# Altium PCB MainPcb.PcbDoc
Units mm, origin at the board's own origin, x right, y up, seen from the top; angles counter-clockwise.
Board outline 50 x 76 mm, 2 copper layers (Top Layer, Bottom Layer); 50 components, 76 nets, 385 pads, 50 vias.
Unrouted connection lines stored in the file: 139.
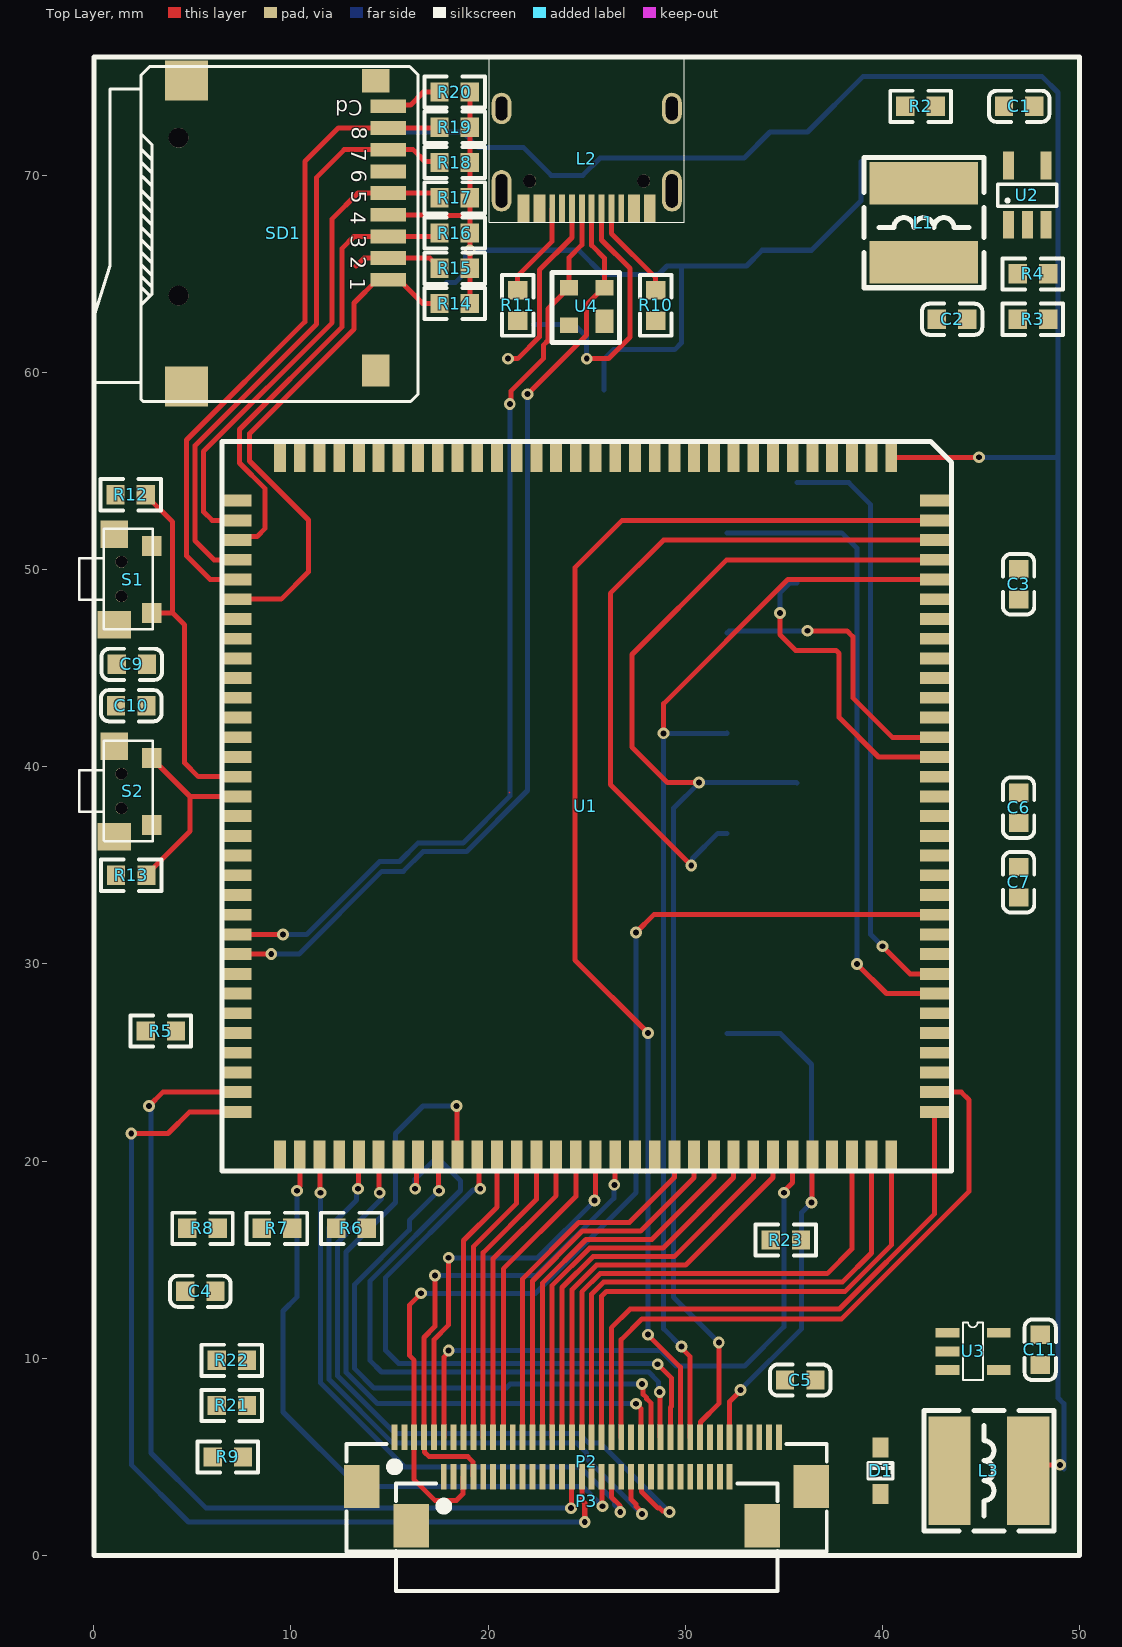
[diagram p0: Top Layer view]
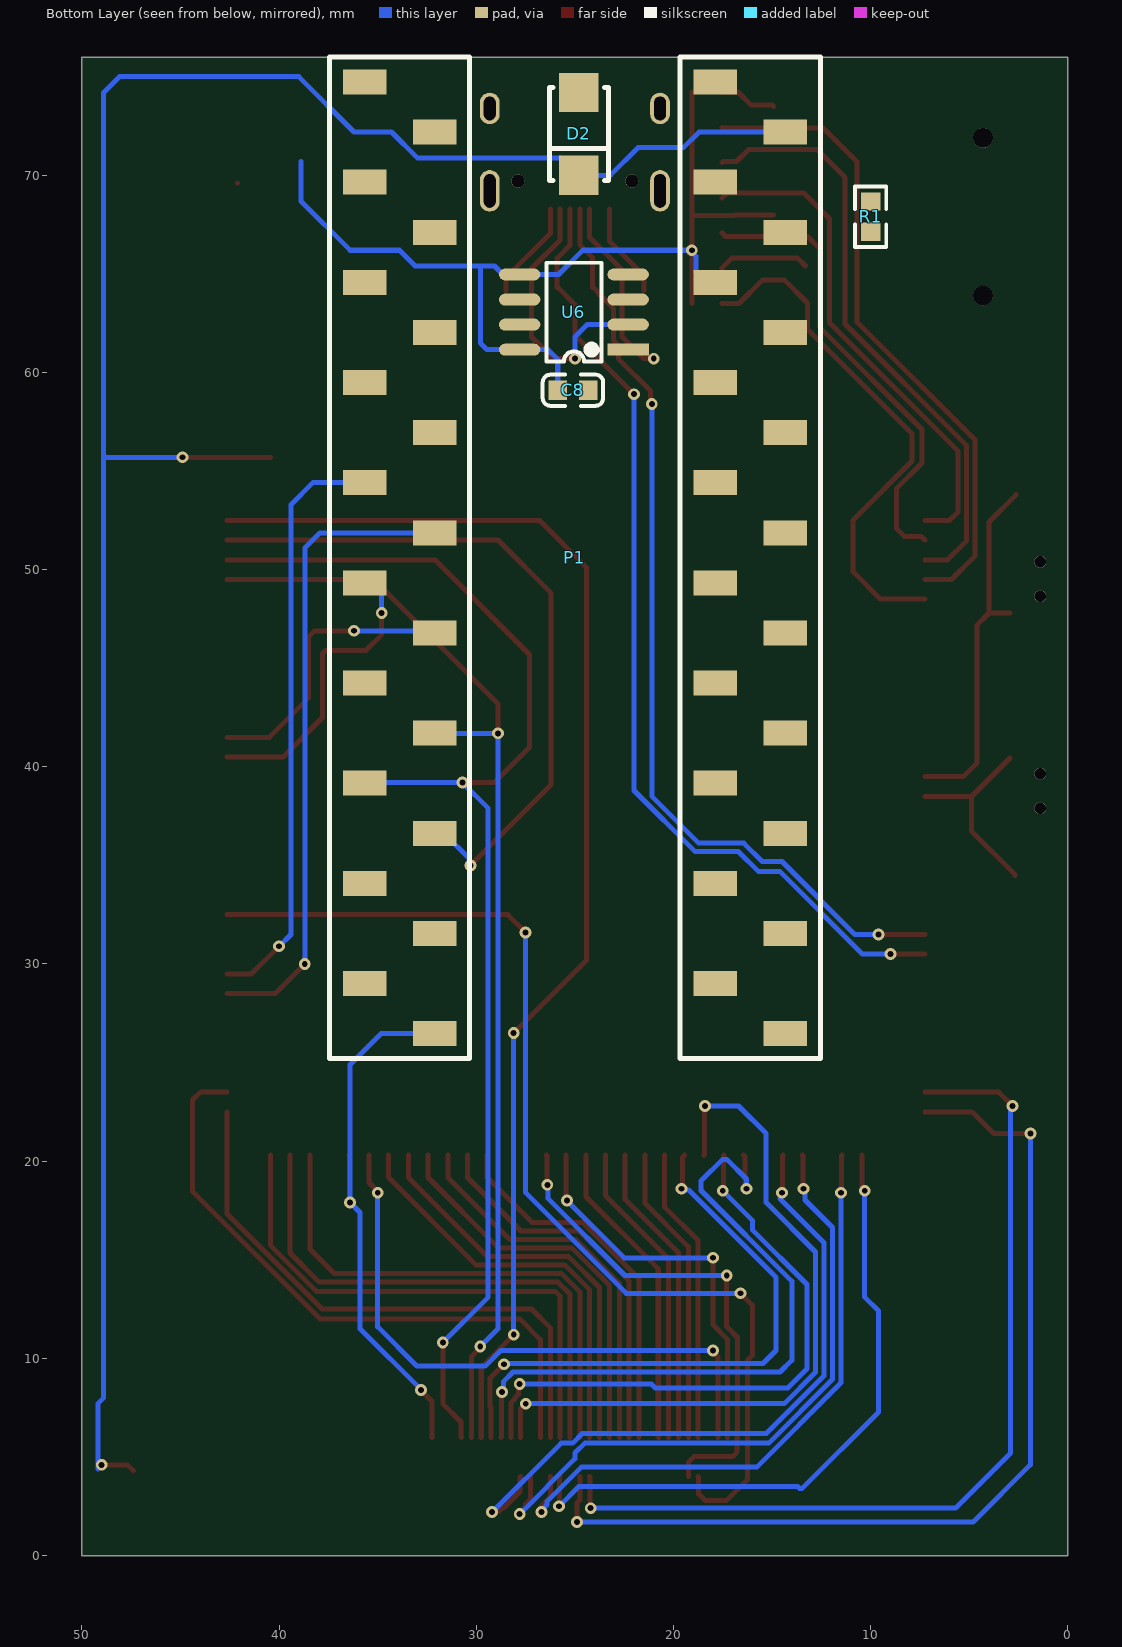
[diagram p1: Bottom Layer view, seen from below]

## Layer stack, top to bottom
Top Solder: solder mask 0.0102, Solder Resist, Dk 3.5
Top Layer: signal copper 0.0356
Dielectric 1: dielectric 0.32, FR-4, Dk 4.8
Bottom Layer: signal copper 0.0356
Bottom Solder: solder mask 0.0102, Solder Resist, Dk 3.5

## Board outline
0,0 0,76 50,76 50,0

## Design rules (kind name [scope] priority, off if disabled: settings)
Clearance [All] p1: gap=0.178 ignorepadtopadclearanceinfootprint=FALSE
PolygonConnect [All] p1: connectstyle=Relief reliefconductorwidth=0.254 reliefentries=4 polygonreliefangle="90 Angle" airgapwidth=0.254
RoutingVias [All] p1: holewidth=0.3 width=0.6 viastyle="Through Hole" minholewidth=0.3 minwidth=0.5 maxholewidth=0.3 maxwidth=1
SolderMaskExpansion [All] p1: expansion=0.102 istentingtop=FALSE
SupplyNets "Schematic Supply Nets_4" [InNet('VCCIO_3V3')] p1: voltage=0.000
SupplyNets "Schematic Supply Nets_2" [InNet('VSYS')] p2: voltage=0.000
SupplyNets "Schematic Supply Nets_1" [InNet('VCC_3V3')] p3: voltage=0.000
SupplyNets "Schematic Supply Nets" [InNet('GND')] p4: voltage=0.000
Width [All] p1: maxlimit=25.4 minlimit=0.127 preferedwidth=0.254
30 further rules are at their usual default settings.

## Components (designator, comment, footprint, x,y, rotation, side; value= is the part's Value field where it differs from the comment)
C1 "10uF (106) 10% 10V" LC-0603_C 46.93,73.5 r180 top
C2 "22pF (220) 5% 50V" LC-0603_C 43.53,62.7 r180 top
C3 "10uF (106) 10% 10V" LC-0603_C 46.907,49.258 r90 top
C4 "1uF (105) 10% 50V" LC-0603_C 5.4,13.4 r0 top
C5 "1uF (105) 10% 50V" LC-0603_C 35.83,8.9 r180 top
C6 "1uF (105) 10% 50V" LC-0603_C 46.907,37.924 r90 top
C7 "10uF (106) 10% 10V" LC-0603_C 46.907,34.146 r90 top
C8 "1uF (105) 10% 50V" LC-0603_C 25.1,59.1 r0 bottom
C9 "100nF (104) 10% 50V" LC-0603_C 1.93,45.2 r0 top
C10 "100nF (104) 10% 50V" LC-0603_C 1.9,43.1 r0 top
C11 "1uF (105) 10% 50V" LC-0603_C 48,10.43 r90 top
D1 "1N4148WS T4" LC-SOD-323 39.9,4.3 r270 top
D2 "SS54" LC-SMA(DO-214AC)_S1 24.8,72.1 r90 bottom
L1 "2.2uH" L-CD52 42.1,67.6 r90 top
L2 "Micro-USB3.1_TYPE-C" USB_TYPEC_SMD_16P 25,72.317 r0 top
L3 "2.2uH" L-CD52 45.4,4.3 r0 top
P1 "PicoCale" PICO 25,76 r180 bottom locked
P2 "RGB LCD" FPC0.5-40 24.476,3.5 r0 top locked
P3 "MIPI LCD" FPC0.5-30 17.75,4 r0 top locked
R1 "10KΩ (1002) ±1%" LC-0603_R 10,67.9 r270 bottom
R2 "10KΩ (1002) ±1%" LC-0603_R 41.93,73.5 r180 top
R3 "10KΩ (1002) ±1%" LC-0603_R 47.63,62.7 r180 top
R4 "10KΩ (1002) ±1%" LC-0603_R 47.63,65 r0 top
R5 "0Ω (0R0) ±1%" LC-0603_R 3.4,26.6 r0 top
R6 "100KΩ (1003) ±1%" LC-0603_R 13.069,16.593 r0 top
R7 "10Ω (10R0) ±1%" LC-0603_R 9.291,16.593 r0 top
R8 "10Ω (10R0) ±1%" LC-0603_R 5.513,16.593 r0 top
R9 "10KΩ (1002) ±1%" LC-0603_R 6.8,5 r0 top
R10 "5.1KΩ (5101) ±1%" LC-0603_R 28.5,63.4 r90 top
R11 "5.1KΩ (5101) ±1%" LC-0603_R 21.5,63.4 r90 top
R12 "10KΩ (1002) ±1%" LC-0603_R 1.87,53.8 r180 top
R13 "10KΩ (1002) ±1%" LC-0603_R 1.9,34.5 r180 top
R14 "10KΩ (1002) ±1%" LC-0603_R 18.3,63.496 r0 top
R15 "10KΩ (1002) ±1%" LC-0603_R 18.3,65.284 r0 top
R16 "10KΩ (1002) ±1%" LC-0603_R 18.3,67.072 r0 top
R17 "10KΩ (1002) ±1%" LC-0603_R 18.3,68.86 r0 top
R18 "10KΩ (1002) ±1%" LC-0603_R 18.3,70.648 r0 top
R19 "10KΩ (1002) ±1%" LC-0603_R 18.3,72.436 r0 top
R20 "10KΩ (1002) ±1%" LC-0603_R 18.3,74.224 r0 top
R21 "10KΩ (1002) ±1%" LC-0603_R 7,7.612 r0 top
R22 "10KΩ (1002) ±1%" LC-0603_R 7,9.9 r0 top
R23 "10KΩ (1002) ±1%" LC-0603_R 35.1,16 r180 top
S1 "SW-PB" TS-1030 2.937,47.808 r0 top
S2 "SW-PB" TS-1030 2.937,37.058 r0 top
SD1 "SD-CARD" SD-CARD-Micro 4.7,74.8 r270 top locked
U1 "RK3506" RK3506 40.447,55.7 r180 top locked
U2 "SY8088" SOT23-5#1 46.4,67.5 r0 top
U3 "MP3302" SOT23-5#2 43.3,11.3 r0 top
U4 "UET14A05L03" SOT-143 25.9,62.4 r90 top
U6 "CH340N" SOP8 22.3,61.16 r0 bottom

## Footprints (in the part's own frame and the unit in brackets; to place one, negate y for a bottom-side part, rotate by r counter-clockwise, add the part's x,y. Pads: shape width x height; smd on the part's side, far side on the other; paste and mask are expansions set on the pad)
FPC0.5-30 [mm]
  rect 1.8x2.2 smd: 0(-1.65,-2.497) 0(16.15,-2.497)
  rect 0.3x1.3 smd: 1(14.5,0) 2(14,0) 3(13.5,0) 4(13,0) 5(12.5,0) 6(12,0) 7(11.5,0) 8(11,0) 9(10.5,0) 10(10,0) 11(9.5,0) 12(9,0) 13(8.5,0) 14(8,0) 15(7.5,0) 16(7,0) 17(6.5,0) 18(6,0) 19(5.5,0) 20(5,0) 21(4.5,0) 22(4,0) 23(3.5,0) 24(3,0) 25(2.5,0) 26(2,0) 27(1.5,0) 28(1,0) 29(0.5,0) 30(0,0)
  silkscreen extent -2.42,-5.8 16.93,-0.34
FPC0.5-40 [mm]
  rect 1.8x2.2 smd: 0(-10.876,0) 0(11.924,0)
  rect 0.3x1.3 smd: 1(10.274,2.497) 2(9.774,2.497) 3(9.274,2.497) 4(8.774,2.497) 5(8.274,2.497) 6(7.774,2.497) 7(7.274,2.497) 8(6.774,2.497) 9(6.274,2.497) 10(5.774,2.497) 11(5.274,2.497) 12(4.774,2.497) 13(4.274,2.497) 14(3.774,2.497) 15(3.274,2.497) 16(2.774,2.497) 17(2.274,2.497) 18(1.774,2.497) 19(1.274,2.497) 20(0.774,2.497) 21(0.274,2.497) 22(-0.226,2.497) 23(-0.726,2.497) 24(-1.226,2.497) 25(-1.726,2.497) 26(-2.226,2.497) 27(-2.726,2.497) 28(-3.226,2.497) 29(-3.726,2.497) 30(-4.226,2.497) 31(-4.726,2.497) 32(-5.226,2.497) 33(-5.726,2.497) 34(-6.226,2.497) 35(-6.726,2.497) 36(-7.226,2.497) 37(-7.726,2.497) 38(-8.226,2.497) 39(-8.726,2.497) 40(-9.226,2.497)
  silkscreen extent -11.65,-3.3 12.7,2.16, body extent -11.57,-3.23 12.63,2.77, height 2
L-CD52 [mm] "5.8*5.2*3mm（长宽高）"
  rect 2.15x5.5 smd: 1(-2,0) 2(2,0)
  silkscreen extent -3.3,-3.05 3.3,3.05, body extent -2.75,-2.29 3,2.71, height 3.2
LC-0603_C [mm]
  rect 0.93x0.98 smd: 1(-0.77,0) 2(0.77,0)
  silkscreen extent -1.53,-0.79 1.54,0.79, body extent -0.8,-0.4 0.8,0.4, height 0.3
LC-0603_R [mm]
  rect 0.93x0.98 smd: 1(-0.77,0) 2(0.77,0)
  silkscreen extent -1.53,-0.79 1.54,0.79, body extent -0.85,-0.4 0.85,0.4, height 0.56
LC-SMA(DO-214AC)_S1 [mm]
  rect 2x2 smd: 1(2.1,0) 2(-2.1,0)
  silkscreen extent -2.35,-1.5 2.35,1.5
LC-SOD-323 [mm]
  rect 1x0.83 smd: 1(1.18,0) 2(-1.18,0)
  silkscreen extent -0.4,-0.6 0.4,0.6, body extent -1.35,-0.62 1.35,0.63, height 1.1
PICO [mm]
  rect 2.2x1.27 smd: 1(7.112,-1.27) 2(10.668,-3.81) 3(7.112,-6.35) 4(10.668,-8.89) 5(7.112,-11.43) 6(10.668,-13.97) 7(7.112,-16.51) 8(10.668,-19.05) 9(7.112,-21.59) 10(10.668,-24.13) 11(7.112,-26.67) 12(10.668,-29.21) 13(7.112,-31.75) 14(10.668,-34.29) 15(7.112,-36.83) 16(10.668,-39.37) 17(7.112,-41.91) 18(10.668,-44.45) 19(7.112,-46.99) 20(10.668,-49.53) 21(-10.668,-1.27) 22(-7.112,-3.81) 23(-10.668,-6.35) 24(-7.112,-8.89) 25(-10.668,-11.43) 26(-7.112,-13.97) 27(-10.668,-16.51) 28(-7.112,-19.05) 29(-10.668,-21.59) 30(-7.112,-24.13) 31(-10.668,-26.67) 32(-7.112,-29.21) 33(-10.668,-31.75) 34(-7.112,-34.29) 35(-10.668,-36.83) 36(-7.112,-39.37) 37(-10.668,-41.91) 38(-7.112,-44.45) 39(-10.668,-46.99) 40(-7.112,-49.53)
  silkscreen extent -12.45,-50.8 12.45,0
RK3506 [mm]
  rect 0.6x1.5 smd: 1(0,0) 2(1,0) 3(2,0) 4(3,0) 5(4,0) 6(5,0) 7(6,0) 8(7,0) 9(8,0) 10(9,0) 11(10,0) 12(11,0) 13(12,0) 14(13,0) 15(14,0) 16(15,0) 17(16,0) 18(17,0) 19(18,0) 20(19,0) 21(20,0) 22(21,0) 23(22,0) 24(23,0) 25(24,0) 26(25,0) 27(26,0) 28(27,0) 29(28,0) 30(29,0) 31(30,0) 32(31,0) 65(31,35.4) 66(30,35.4) 67(29,35.4) 68(28,35.4) 69(27,35.4) 70(26,35.4) 71(25,35.4) 72(24,35.4) 73(23,35.4) 74(22,35.4) 75(21,35.4) 76(20,35.4) 77(19,35.4) 78(18,35.4) 79(17,35.4) 80(16,35.4) 81(15,35.4) 82(14,35.4) 83(13,35.4) 84(12,35.4) 85(11,35.4) 86(10,35.4) 87(9,35.4) 88(8,35.4) 89(7,35.4) 90(6,35.4) 91(5,35.4) 92(4,35.4) 93(3,35.4) 94(2,35.4) 95(1,35.4) 96(0,35.4)
  rect 1.5x0.6 smd: 33(33.2,2.2) 34(33.2,3.2) 35(33.2,4.2) 36(33.2,5.2) 37(33.2,6.2) 38(33.2,7.2) 39(33.2,8.2) 40(33.2,9.2) 41(33.2,10.2) 42(33.2,11.2) 43(33.2,12.2) 44(33.2,13.2) 45(33.2,14.2) 46(33.2,15.2) 47(33.2,16.2) 48(33.2,17.2) 49(33.2,18.2) 50(33.2,19.2) 51(33.2,20.2) 52(33.2,21.2) 53(33.2,22.2) 54(33.2,23.2) 55(33.2,24.2) 56(33.2,25.2) 57(33.2,26.2) 58(33.2,27.2) 59(33.2,28.2) 60(33.2,29.2) 61(33.2,30.2) 62(33.2,31.2) 63(33.2,32.2) 64(33.2,33.2) 97(-2.2,33.2) 98(-2.2,32.2) 99(-2.2,31.2) 100(-2.2,30.2) 101(-2.2,29.2) 102(-2.2,28.2) 103(-2.2,27.2) 104(-2.2,26.2) 105(-2.2,25.2) 106(-2.2,24.2) 107(-2.2,23.2) 108(-2.2,22.2) 109(-2.2,21.2) 110(-2.2,20.2) 111(-2.2,19.2) 112(-2.2,18.2) 113(-2.2,17.2) 114(-2.2,16.2) 115(-2.2,15.2) 116(-2.2,14.2) 117(-2.2,13.2) 118(-2.2,12.2) 119(-2.2,11.2) 120(-2.2,10.2) 121(-2.2,9.2) 122(-2.2,8.2) 123(-2.2,7.2) 124(-2.2,6.2) 125(-2.2,5.2) 126(-2.2,4.2) 127(-2.2,3.2) 128(-2.2,2.2)
  silkscreen extent -3.05,-0.8 33.95,36.2
SD-CARD-Micro [mm]
  rect 2.032x2.2 smd: 0(0,0) 0(15.5,0)
  rect 1.2x1.4 smd: 0(0,9.6)
  round 1 hole 1 unplated: 0(2.9,-0.4) 0(10.9,-0.4)
  rect 1.6x1.4 smd: 0(14.7,9.6)
  rect 0.7x1.8 smd: 1(10.1,10.227) 2(9,10.227) 3(7.9,10.227) 4(6.8,10.227) 5(5.7,10.227) 6(4.6,10.227) 7(3.5,10.227) 8(2.4,10.227) 9(1.3,10.227)
  Top Layer lines w0.03: 36.114,16.373 36.064,16.423
  silkscreen extent -0.72,-4.68 16.27,11.75, body extent -0.27,-4.63 16,10.57, height 1.8
SOP8 [mm]
  rect 2.1x0.6 smd: 1(0,0)
  oval 2.1x0.6 smd: 2(0,-1.27) 3(0,-2.54) 4(0,-3.81) 5(5.5,-3.81) 6(5.5,-2.54) 7(5.5,-1.27) 8(5.5,0)
  silkscreen extent 1.35,-4.41 4.15,0.6, body extent -0.21,-4.4 5.8,0.6, height 1.9
SOT23-5#1 [mm]
  rect 0.55x1.4 smd: 1(0,0) 2(0.95,0) 3(1.9,0) 4(1.9,3) 5(0,3)
  silkscreen extent -0.55,0.94 2.45,2.06, body extent -0.55,0.27 2.45,3.08, height 1.15
SOT23-5#2 [mm]
  rect 1.2x0.5 smd: 1(0,0) 2(0,-0.95) 3(0,-1.9) 4(2.6,-1.9) 5(2.6,0)
  silkscreen extent 0.79,-2.4 1.8,0.52, body extent -0.11,-2.4 2.71,0.5, height 1.42
SOT-143 [mm]
  rect 1.2x0.9 smd: 1(0.2,0)
  rect 0.8x0.9 smd: 2(1.9,0) 3(1.9,1.8) 4(0,1.8)
  silkscreen extent -0.89,-0.76 2.67,2.67
TS-1030 [mm]
  rect 1x1 smd: 1(0,-0.003) 2(0,3.387)
  rect 1.7x1.4 smd: 3(-1.9,-0.608)
  rect 1.4x1.4 smd: 4(-1.9,3.992)
  round 0.6 hole 0.6: ""(-1.537,0.842) ""(-1.537,2.592)
  silkscreen extent -3.69,-0.83 0.05,4.27, body extent -3.56,-0.89 0.13,4.32, height 1
USB_TYPEC_SMD_16P [mm]
  oval 1x2.1 hole 0.6 slot 1.7 at 90 deg: 0(-4.32,-3.105) 0(4.32,-3.105)
  oval 1x1.6 hole 0.6 slot 1.2 at 90 deg: 0(-4.32,1.075) 0(4.32,1.075)
  round 0.66 hole 0.66: 4(-2.89,-2.605) 4(2.89,-2.605)
  rect 0.6x1.45 smd: A1B12(3.2,-4.02) A4B9(2.4,-4.02) B1A12(-3.2,-4.02) B4A9(-2.4,-4.02)
  rect 0.3x1.45 smd: A5(1.25,-4.02) A6(0.25,-4.02) A7(-0.25,-4.02) A8(-1.25,-4.02) B5(-1.75,-4.02) B6(-0.75,-4.02) B7(0.75,-4.02) B8(1.75,-4.02)
  silkscreen extent -4.95,-4.7 4.95,3.68, body extent -4.48,-4.65 4.48,4.7, height 3.21

## Part data
C1 C3 C7: library part "0603 10uF (106) 10% 10V", "贴片电容", Package=0603, SuppliersPartNumber=C19702, ComponentLink1Description=供应商链接, ComponentLink1URL=http://www.szlcsc.com/product/details_20411.html, Supplier=LC
C2: library part "0603 22pF (220) 5% 50V", "贴片电容", Package=0603, SuppliersPartNumber=C1653, ComponentLink1Description=供应商链接, ComponentLink1URL=http://www.szlcsc.com/product/details_2005.html, Supplier=LC
C4 C5 C6 C8 C11: library part "0603 1uF (105) 10% 50V", "贴片电容", Package=0603, SuppliersPartNumber=C15849, ComponentLink1Description=供应商链接, ComponentLink1URL=http://www.szlcsc.com/product/details_16531.html, Supplier=LC
C9 C10: library part "0603 100nF (104) 10% 50V", "贴片电容", Package=0603, SuppliersPartNumber=C14663, ComponentLink1Description=供应商链接, ComponentLink1URL=http://www.szlcsc.com/product/details_15331.html, Supplier=LC
D1: library part "SOD-323 1N4148WS T4", "二极管", Package=SOD-323, SuppliersPartNumber=C2128, ComponentLink1Description=供应商链接, ComponentLink1URL=http://www.szlcsc.com/product/details_2485.html, Supplier=LC
D2: library part "SMA(DO-214AC) SS54", "二极管", Package=SMA(DO-214AC), SuppliersPartNumber=C22452, ComponentLink1Description=供应商链接, ComponentLink1URL=http://www.szlcsc.com/product/details_23178.html, Supplier=LC
L1 L3: library part INDUCTOR, "电感", Text Field1=20, Text Field2=30
P1: library part PicoCale_Socket
P2: library part RGB_40PIN
P3: library part MIPI_30P
R1 R2 R3 R4 R9 R12 R13 R14 R15 R16 R17 R18 R19 R20 R21 R22 R23: library part "0603 10KΩ (1002) 1%", "贴片电阻", Package=0603, SuppliersPartNumber=C25804, ComponentLink1Description=供应商链接, ComponentLink1URL=http://www.szlcsc.com/product/details_26547.html, Supplier=LC
R5: library part "0603 0Ω (0R0) 1%", "贴片电阻", Package=0603, SuppliersPartNumber=C21189, ComponentLink1Description=供应商链接, ComponentLink1URL=http://www.szlcsc.com/product/details_21903.html, Supplier=LC
R6: library part "0603 100KΩ (1003) 1%", "贴片电阻", Package=0603, SuppliersPartNumber=C25803, ComponentLink1Description=供应商链接, ComponentLink1URL=http://www.szlcsc.com/product/details_26546.html, Supplier=LC
R7 R8: library part "0603 10Ω (10R0) 1%", "贴片电阻", Package=0603, SuppliersPartNumber=C22859, ComponentLink1Description=供应商链接, ComponentLink1URL=http://www.szlcsc.com/product/details_23586.html, Supplier=LC
R10 R11: library part "0603 5.1KΩ (5101) 1%", "贴片电阻", Package=0603, SuppliersPartNumber=C23186, ComponentLink1Description=供应商链接, ComponentLink1URL=http://www.szlcsc.com/product/details_23913.html, Supplier=LC
S1 S2: "轻触开关", LatestRevisionDate=17-Jul-2002, LatestRevisionNote="Re-released for DXP Platform.", PackageDescription="Switch; 2 Leads", PackageReference=SPST-2, Published=24-Mar-1999, Publisher="Altium Limited"
U1: library part RK3506G_CORE

## Via types
v1: diameter 0.6, hole 0.3, Top Layer to Bottom Layer, 50 vias

## Nets (pads, with @x,y where several pads share a name; then routed paths per layer and width w, separated by ;. In a path a pad name is that pad's centre, name@x,y a point inside that pad or via, vN(x,y) a via of type N, cw(c..) or ccw(c..) an arc to the next point about the centre after c; other vN are vias at no path point)
AGND: P1.8 R5.2
BOOT: C10.2 R13.1 S2.2 U1.48 | length 10
  Top Layer w0.254: R13.1 2.67,34.525 4.882,36.737 4.882,38.5 ; S2.2 3.31,40.072 4.882,38.5 ; U1.48 4.882,38.5
DBG_DM: L2.B7 U6.2 | length 13.8
  Top Layer w0.254: v1(25,60.7) 26.1,60.7 27.2,61.8 27.2,65.274 25.75,66.724 L2.B7
  Bottom Layer w0.254: U6.2 24.37,62.43 25,61.8 v1(25,60.7)
DBG_DP: L2.B6 U6.1 | length 9.2
  Top Layer w0.254: v1(21,60.7) 21.5,60.7 22.6,61.8 22.6,65.2 24.25,66.85 L2.B6
DBG_RX: P1.22 U1.112 U6.6
DBG_TX: P1.21 U1.111 U6.7
EXT_CS: P1.37 U1.101
GND: C1.1 C3.1 C4.1 C5.1 C6.2 C7.1 C8.1 C9.1 C10.1 C11.2 L2.A1B12 L2.B1A12 P1.3 P1.13 P1.18 P1.23 P1.28 P1.33 P1.38 P2.4 P2.16 P2.28 P2.34 P2.40 P3.9 P3.12 P3.15 P3.18 P3.21 P3.24 R4.1 R5.1 R6.2 R7.1 R8.1 R10.1 R11.1 S1.2 S2.1 SD1.0 SD1.6 U1.9 U1.10 U1.11 U1.12 U1.22 U1.32 U1.33 U1.54 U1.59 U1.62 U1.65 U1.68 U1.71 U1.84 U1.93 U1.102 U1.110 U1.123 U1.128 U2.2 U3.2 U4.1 U6.3
KB_SCL: P1.30 U1.103 | length 32.6
  Top Layer w0.254: v1(38.7,30) 40.2,28.5 U1.103
  Bottom Layer w0.254: P1.30 37.93,51.87 38.7,51.1 v1(38.7,30)
KB_SDA: P1.29 U1.104 | length 30.1
  Top Layer w0.254: v1(40,30.9) 41.4,29.5 U1.104
  Bottom Layer w0.254: P1.29 38.29,54.41 39.4,53.3 39.4,31.5 v1(40,30.9)
LCD_BK: P3.8 R9.1 U1.99
LCD_CS: P2.11 U1.127 | length 65.6
  Top Layer w0.254: v1(28.1,11.2) 29.75,9.55 P2.11 ; v1(28.105,26.5) 24.4,30.205 24.4,50.1 26.8,52.5 U1.127
  Bottom Layer w0.254: v1(28.1,11.2) 28.102,11.202 28.102,26.498 v1(28.105,26.5)
LCD_D3: P2.17 U1.98 | length 32.3
  Top Layer w0.254: P2.17 26.75,10.95 27.8,12 37.932,12 44.4,18.468 44.4,23.1 44,23.5 U1.98
LCD_D4: P2.18 U1.97 | length 29.5
  Top Layer w0.254: P2.18 26.25,11.55 27.2,12.5 37.821,12.5 42.647,17.326 U1.97
LCD_D5: P2.19 U1.96 | length 27.5
  Top Layer w0.254: P2.19 25.75,13.15 26,13.4 38.111,13.4 40.447,15.736 U1.96
LCD_D6: P2.20 U1.95 | length 27.3
  Top Layer w0.254: P2.20 25.25,13.261 25.853,13.864 37.964,13.864 39.447,15.347 U1.95
LCD_D7: P2.21 U1.94 | length 26.7
  Top Layer w0.254: P2.21 24.75,13.371 25.674,14.296 37.196,14.296 38.447,15.547 U1.94
LCD_D10: P2.22 U1.90 | length 21.2
  Top Layer w0.254: P2.22 24.25,13.482 25.495,14.727 30.005,14.727 34.447,19.169 U1.90
LCD_D11: P2.23 U1.89 | length 20.7
  Top Layer w0.254: P2.23 23.75,13.593 25.317,15.159 29.437,15.159 33.447,19.169 U1.89
LCD_D12: P2.24 U1.88 | length 20.3
  Top Layer w0.254: P2.24 23.25,13.703 25.138,15.591 28.869,15.591 32.447,19.169 U1.88
LCD_D13: P2.25 U1.87 | length 19.9
  Top Layer w0.254: P2.25 22.75,13.814 24.959,16.023 28.301,16.023 31.447,19.169 U1.87
LCD_D14: P2.26 U1.86 | length 19.4
  Top Layer w0.254: P2.26 22.25,13.925 24.78,16.455 27.733,16.455 30.447,19.169 U1.86
LCD_D15: P2.27 U1.85 | length 19
  Top Layer w0.254: P2.27 21.75,14.035 24.601,16.886 27.164,16.886 29.447,19.169 U1.85
LCD_D19: P2.29 U1.80 | length 15.8
  Top Layer w0.254: P2.29 20.773,6.02 20.773,14.538 24.447,18.212 U1.80
LCD_D20: P2.30 U1.79 | length 15.6
  Top Layer w0.254: P2.30 20.25,15.057 23.447,18.254 U1.79
LCD_D21: P2.31 U1.78 | length 15.4
  Top Layer w0.254: P2.31 19.75,15.362 22.447,18.059 U1.78
LCD_D22: P2.32 U1.77 | length 15.2
  Top Layer w0.254: P2.32 19.25,15.667 21.447,17.864 U1.77
LCD_D23: P2.33 U1.76 | length 15
  Top Layer w0.254: P2.33 18.75,15.973 20.447,17.669 U1.76
LCD_DC: P1.39 U1.100
LCD_DEN: P2.13 U1.72 | length 34.4
  Top Layer w0.254: v1(16.3,18.6) 16.366,18.666 16.366,20.219 U1.72 ; v1(28.7,8.3) 28.727,8.273 28.727,6.02 P2.13
  Bottom Layer w0.254: v1(16.3,18.6) 16.3,19.1 17.295,20.095 17.505,20.095 18.6,19 18.6,18.511 14,13.911 14,9.9 14.595,9.305 28.14,9.305 28.634,8.811 28.634,8.366 v1(28.7,8.3)
LCD_HSYNC: P2.15 U1.74 | length 36.5
  Top Layer w0.254: v1(18.4,22.8) 18.423,22.777 18.423,20.323 U1.74 ; v1(27.491,7.696) 27.504,7.696 27.75,7.45 P2.15
  Bottom Layer w0.254: v1(18.4,22.8) 16.7,22.8 15.3,21.4 15.3,17.9 12.795,15.395 12.795,9.294 14.389,7.7 27.487,7.7 v1(27.491,7.696)
LCD_MISO: P1.36 U1.126 | length 35.7
  Top Layer w0.254: v1(30.3,35) 26.2,39.1 26.2,48.8 28.9,51.5 U1.126
  Bottom Layer w0.254: v1(30.3,35) 30.366,35.066 30.366,35.349 31.647,36.63 P1.36
LCD_MOSI: P1.35 P2.9 U1.125 | length 66.2
  Top Layer w0.254: v1(30.7,39.2) 29.1,39.2 27.3,41 27.3,45.7 32.1,50.5 U1.125 ; P2.9 30.773,6.02 30.773,6.773 31.7,7.7 v1(31.7,10.8)
  Bottom Layer w0.254: v1(31.7,10.8) 29.4,13.1 29.4,37.9 v1(30.7,39.2) 35.638,39.2 P1.35
LCD_PCLK: P2.12 U1.75 | length 30.2
  Top Layer w0.254: U1.75 19.534,20.213 19.534,18.666 v1(19.6,18.6) ; v1(28.6,9.7) 29.305,8.995 29.305,7.563 29.25,7.508 P2.12
  Bottom Layer w0.254: v1(19.6,18.6) 19.534,18.534 19.234,18.534 14.805,14.105 14.805,10.395 15.463,9.737 28.563,9.737 v1(28.6,9.7)
LCD_RESET: P1.40 P2.6 P3.6 U1.92 | length 28
  Top Layer w0.254: P2.6 32.25,7.807 32.8,8.357 v1(32.8,8.4) ; v1(36.4,17.9) 36.423,17.923 36.423,20.276 U1.92
  Bottom Layer w0.254: P1.40 34.83,26.47 36.4,24.9 v1(36.4,17.9) 35.9,17.4 35.9,11.5 v1(32.8,8.4)
LCD_SCK: P1.34 P2.10 U1.124 | length 57.3
  Top Layer w0.254: v1(28.9,41.7) 28.9,43.2 35.2,49.5 U1.124 ; v1(29.8,10.6) 29.8,10.537 30.25,10.087 P2.10
  Bottom Layer w0.254: v1(29.8,10.6) 28.9,11.5 v1(28.9,41.7) 32.102,41.7 P1.34
LCD_VSYNC: P2.14 U1.73 | length 30.6
  Top Layer w0.254: U1.73 17.473,20.273 17.473,18.527 v1(17.5,18.5) ; v1(27.8,8.7) 27.866,8.634 27.866,8.176 28.04,8.002 28.04,7.949 28.25,7.74 P2.14
  Bottom Layer w0.254: v1(17.5,18.5) 16,17 16,16.521 13.227,13.749 13.227,9.473 14.2,8.5 20.921,8.5 21.121,8.7 v1(27.8,8.7)
LEDA: C6.1 D1.2 P2.1 P3.1
LEDK: P2.2 P2.3 P3.2 P3.3 R7.2 R8.2 U3.3
MIPI_CLKN: P3.17 U1.63 | length 46.5
  Top Layer w0.254: v1(2.8,22.8) 3.5,23.5 U1.63 ; v1(24.2,2.4) 24.227,2.427 24.227,3.977 P3.17
  Bottom Layer w0.254: v1(2.8,22.8) 2.9,22.7 2.9,5.2 5.7,2.4 v1(24.2,2.4)
MIPI_CLKP: P3.16 U1.64 | length 49.2
  Top Layer w0.254: v1(1.9,21.4) 3.759,21.4 4.859,22.5 U1.64 ; P3.16 24.75,2.814 24.9,2.663 v1(24.9,1.7)
  Bottom Layer w0.254: v1(1.9,21.4) 1.9,4.6 4.8,1.7 v1(24.9,1.7)
MIPI_D0N: P3.11 U1.69 | length 33
  Top Layer w0.254: v1(13.4,18.6) 13.423,18.623 13.423,20.277 U1.69 ; P3.11 27.25,2.85 27.5,2.6 27.5,2.494 27.8,2.194 v1(27.8,2.1)
  Bottom Layer w0.254: v1(13.4,18.6) 13.334,18.534 13.334,18.034 11.932,16.632 11.932,8.936 15.168,5.7 24.5,5.7 25,5.2 25,4.9 v1(27.8,2.1)
MIPI_D0P: P3.10 U1.70 | length 34.5
  Top Layer w0.254: U1.70 14.473,20.273 14.473,18.427 v1(14.5,18.4) ; P3.10 27.773,3.977 27.773,3.246 28.619,2.4 28.7,2.4 28.834,2.266 29.134,2.266 v1(29.2,2.2)
  Bottom Layer w0.254: v1(14.5,18.4) 14.566,18.334 14.566,18.123 14.595,18.095 12.364,15.864 12.364,9.115 15.279,6.2 24.611,6.2 25.111,5.7 25.7,5.7 v1(29.2,2.2)
MIPI_D1N: P3.14 U1.66 | length 33.2
  Top Layer w0.254: v1(10.3,18.5) 10.3,18.594 10.447,18.741 U1.66 ; P3.14 25.773,3.977 25.773,2.527 v1(25.8,2.5)
  Bottom Layer w0.254: v1(10.3,18.5) 10.3,13.1 9.596,12.396 9.596,7.28 13.471,3.405 13.605,3.405 13.7,3.5 24.8,3.5 v1(25.8,2.5)
MIPI_D1P: P3.13 U1.67 | length 31.6
  Top Layer w0.254: U1.67 11.473,20.273 11.473,18.427 v1(11.5,18.4) ; P3.13 26.25,2.969 26.7,2.519 v1(26.7,2.2)
  Bottom Layer w0.254: v1(11.5,18.4) 11.5,8.757 15.757,4.5 24.655,4.5 26.405,2.751 26.405,2.589 26.7,2.294 v1(26.7,2.2)
NetC2_1: C2.1 R3.1 R4.2 U2.5
NetD1_1: D1.1 L3.1 U3.1
NetL1_2: L1.2 U2.3 | length 0
NetL2_A5: L2.A5 R10.2 | length 5.1
  Top Layer w0.254: L2.A5 26.25,67.05 28.5,64.8 R10.2
NetL2_B5: L2.B5 R11.2 | length 4.9
  Top Layer w0.254: R11.2 21.5,64.9 23.25,66.65 L2.B5
NetP1_4: P1.4 R1.2
NetR2_1: R2.1 U2.1
NetR6_1: R6.1 R9.2 U3.4
OTG_DM: L2.A7 U1.55 U4.3 | length 48.1
  Top Layer w0.254: U1.55 v1(9.6,31.5) ; v1(21.1,58.4) 21.166,58.466 21.166,59.066 22.8,60.7 22.8,61.389 23.032,61.621 23.032,63.232 23.777,63.977 23.777,64.027 24.05,64.3 U4.3 24.1,65.823 24.75,66.472 L2.A7
  Bottom Layer w0.254: v1(9.6,31.5) 10.8,31.5 14.5,35.2 15.5,35.2 16.432,36.132 18.721,36.132 21.1,38.511 v1(21.1,58.4)
OTG_DP: L2.A6 U1.56 U4.2 | length 49.6
  Top Layer w0.254: U1.56 v1(9,30.5) ; v1(22,58.9) 25,61.9 25,63.45 25.85,64.3 U4.2 25.9,65.8 25.25,66.45 L2.A6
  Bottom Layer w0.254: v1(9,30.5) 10.411,30.5 14.611,34.7 15.7,34.7 16.7,35.7 18.9,35.7 22,38.8 v1(22,58.9)
RECOVER: C9.2 R12.1 S1.1 U1.47 | length 18.4
  Top Layer w0.254: R12.1 2.64,53.775 4,52.415 4,47.805 ; S1.1 4,47.805 ; U1.47 5.3,39.5 4.6,40.2 4.6,47.205 4,47.805
SD_CLK: R17.1 SD1.5 U1.34 | length 25.5
  Top Layer w0.254: U1.34 6,52.5 5.564,52.936 5.564,56 12.092,62.529 12.092,67.792 13.4,69.1 SD1.5 17.29,69.1 R17.1
SD_CMD: R16.1 SD1.3 U1.35 | length 23.8
  Top Layer w0.254: U1.35 7.42,51.673 8.273,51.673 8.695,52.095 8.695,54.105 7.392,55.408 7.392,57.11 12.6,62.318 12.6,66.3 13.2,66.9 SD1.3 17.358,66.9 R16.1
SD_D0: R18.1 SD1.7 U1.36 | length 30.6
  Top Layer w0.254: U1.36 6.1,50.5 5.132,51.468 5.132,56.287 11.3,62.455 11.3,69.9 12.7,71.3 SD1.7 16.2,71.3 16.8,70.7 17.478,70.7 R18.1
SD_D1: R19.1 SD1.8 U1.37 | length 33.1
  Top Layer w0.254: U1.37 5.9,49.5 4.7,50.7 4.7,56.574 10.7,62.574 10.7,70.7 12.4,72.4 SD1.8 17.494,72.4 R19.1
SD_D2: R14.1 SD1.1 U1.38 | length 26.6
  Top Layer w0.254: U1.38 9.5,48.5 10.888,49.888 10.888,52.523 7.9,55.511 7.9,56.9 13.2,62.2 13.2,63.523 14.377,64.7 SD1.1 15.477,64.7 16.681,63.496 R14.1
SD_D3: R15.1 SD1.2 U1.39 | length 4.6
  Top Layer w0.254: 13.3,65.4 13.7,65.8 SD1.2 17.039,65.8 17.53,65.309 R15.1
SD_DET: R20.1 SD1.9 U1.105 | length 2.9
  Top Layer w0.254: SD1.9 14.986,73.559 16.059,73.559 16.724,74.224 R20.1
TP_INT: P2.35 P3.25 R23.1 U1.91 | length 31.5
  Top Layer w0.254: P2.35 17.75,10.056 18,10.306 v1(18,10.4) ; v1(35,18.4) 35,18.469 35.447,18.916 U1.91
  Bottom Layer w0.254: v1(18,10.4) 28.755,10.4 29.551,9.605 33.005,9.605 35,11.6 v1(35,18.4)
TP_RESET: P2.38 P3.28 U1.107 | length 55.5
  Top Layer w0.254: v1(16.6,13.3) 16,12.7 16,10.152 16.25,9.902 P2.38 16.25,3.85 17.3,2.8 18.4,2.8 18.727,3.127 18.727,3.977 P3.28 ; v1(27.5,31.6) 28.4,32.5 U1.107
  Bottom Layer w0.254: v1(16.6,13.3) 22.4,13.3 27.5,18.4 v1(27.5,31.6)
TP_SCL: P2.37 P3.27 R22.1 U1.82 | length 25.5
  Top Layer w0.254: v1(17.3,14.2) 17.3,11.611 16.75,11.061 P2.37 16.773,5.974 16.773,5.243 17.006,5.01 18.971,5.01 19.227,4.754 19.227,4.023 P3.27 ; v1(26.4,18.8) 26.423,18.823 26.423,20.277 U1.82
  Bottom Layer w0.254: v1(17.3,14.2) 22.455,14.2 26.374,18.119 26.374,18.774 v1(26.4,18.8)
TP_SDA: P2.36 P3.26 R21.1 U1.81 | length 20.3
  Top Layer w0.254: P2.36 17.25,10.95 18,11.7 v1(18,15.1) ; v1(25.4,18) 25.447,18.047 U1.81
  Bottom Layer w0.254: v1(18,15.1) 22.5,15.1 v1(25.4,18)
UART1_RX: U1.114
UART1_TX: U1.113
UART2_RX: P1.32 U1.116 | length 14.6
  Top Layer w0.254: v1(36.2,46.9) 38.2,46.9 38.5,46.6 38.5,43.5 40.5,41.5 U1.116
  Bottom Layer w0.254: P1.32 32.222,46.9 v1(36.2,46.9)
UART2_TX: P1.31 U1.115 | length 15.5
  Top Layer w0.254: v1(34.8,47.8) 34.8,46.7 35.6,45.9 37.651,45.9 37.8,45.751 37.8,42.5 39.8,40.5 U1.115
  Bottom Layer w0.254: v1(34.8,47.8) 34.8,48.822 35.308,49.33 P1.31
VBUS: D2.1 L2.A4B9 L2.B4A9 P1.1 U4.4
VCC_3V3: C2.2 C3.2 C4.2 C5.2 C8.2 C11.1 L1.1 P1.5 P2.5 P2.39 P3.4 P3.29 R1.1 R3.2 R14.2 R15.2 R16.2 R17.2 R18.2 R19.2 R20.2 R21.2 R22.2 R23.2 SD1.4 U6.5 U6.8 | length 50.9
  Top Layer w0.254: SD1.4 16.896,68 16.93,67.966 19.07,67.966 ; R14.2 R15.2 v1(19.07,66.2) R16.2 19.07,67.966 ; R20.2 R19.2 R18.2 R17.2 19.07,67.966
  Bottom Layer w0.254: P1.5 18.353,64.57 18.861,65.078 18.861,65.897 19.07,66.106 v1(19.07,66.2) 24.6,66.2 25.83,64.97 U6.5 28.644,64.97 29.074,65.4 29.8,65.4 ; C8.2 25.87,60.67 26.36,61.16 U6.8 29.46,61.16 29.8,61.5 29.8,65.4 ; 38.9,70.7 38.9,68.7 36.4,66.2 33.9,66.2 33.1,65.4 29.8,65.4
VCCIO_1V8: P3.5 U1.7 U1.8
VCCIO_3V3: P3.30 R2.2 R12.2 R13.2 U1.5 U1.6
VSYS: C1.2 C7.2 D2.2 L3.2 P1.2 U1.1 U1.2 U1.3 U1.4 U2.4 U3.5 | length 118
  Top Layer w0.254: U1.1 v1(44.9,55.7) ; L3.2 47.7,4.6 v1(49,4.6)
  Bottom Layer w0.254: P1.2 18.71,72.19 19.5,71.4 21.8,71.4 23.2,70 D2.2 25.673,70.873 32.973,70.873 34.3,72.2 36.2,72.2 39,75 48.1,75 48.9,74.2 48.9,55.8 ; v1(44.9,55.7) 48.8,55.7 48.9,55.8 ; v1@49.2,4.4 49.2,7.7 48.9,8 48.9,55.8
pads on no net: L2.0 L2.4 L2.A8 L2.B8 P1.6 P1.7 P1.9 P1.10 P1.11 P1.12 P1.14 P1.15 P1.16 P1.17 P1.19 P1.20 P1.24 P1.25 P1.26 P1.27 P2.0 P2.7 P2.8 P3.0 P3.7 P3.19 P3.20 P3.22 P3.23 S1. S1.3 S1.4 S2. S2.3 S2.4 U1.13 U1.14 U1.15 U1.16 U1.17 U1.18 U1.19 U1.20 U1.21 U1.23 U1.24 U1.25 U1.26 U1.27 U1.28 U1.29 U1.30 U1.31 U1.40 U1.41 U1.42 U1.43 U1.44 U1.45 U1.46 U1.49 U1.50 U1.51 U1.52 U1.53 U1.57 U1.58 U1.60 U1.61 U1.83 U1.106 U1.108 U1.109 U1.117 U1.118 U1.119 U1.120 U1.121 U1.122 U6.4

## Silkscreen, mask and mechanical layers (free items; w line width, h text height)
Top Overlay:
  the board outline again, w0.254

## Text inside footprints (layer, text, board x,y; h text height)
SD1: Top Overlay "Cd" at 13.632,73.819 h0.76 r180; Top Overlay "8" at 13.073,72.472 h0.76 r270; Top Overlay "7" at 13.047,71.355 h0.76 r270; Top Overlay "6" at 13.047,70.288 h0.76 r270; Top Overlay "5" at 13.047,69.221 h0.76 r270; Top Overlay "4" at 13.022,68.154 h0.76 r270; Top Overlay "3" at 13.022,66.961 h0.76 r270; Top Overlay "2" at 13.022,65.894 h0.76 r270; Top Overlay "1" at 12.997,64.802 h0.76 r270